# Altium PCB EPU.PcbDoc
Units mil, origin at the board's own origin, x right, y up, seen from the top; angles counter-clockwise.
Board outline 2755.91 x 2952.76 mil, 2 copper layers (Top Layer, Bottom Layer); 25 components, 23 nets, 112 pads, 58 vias.
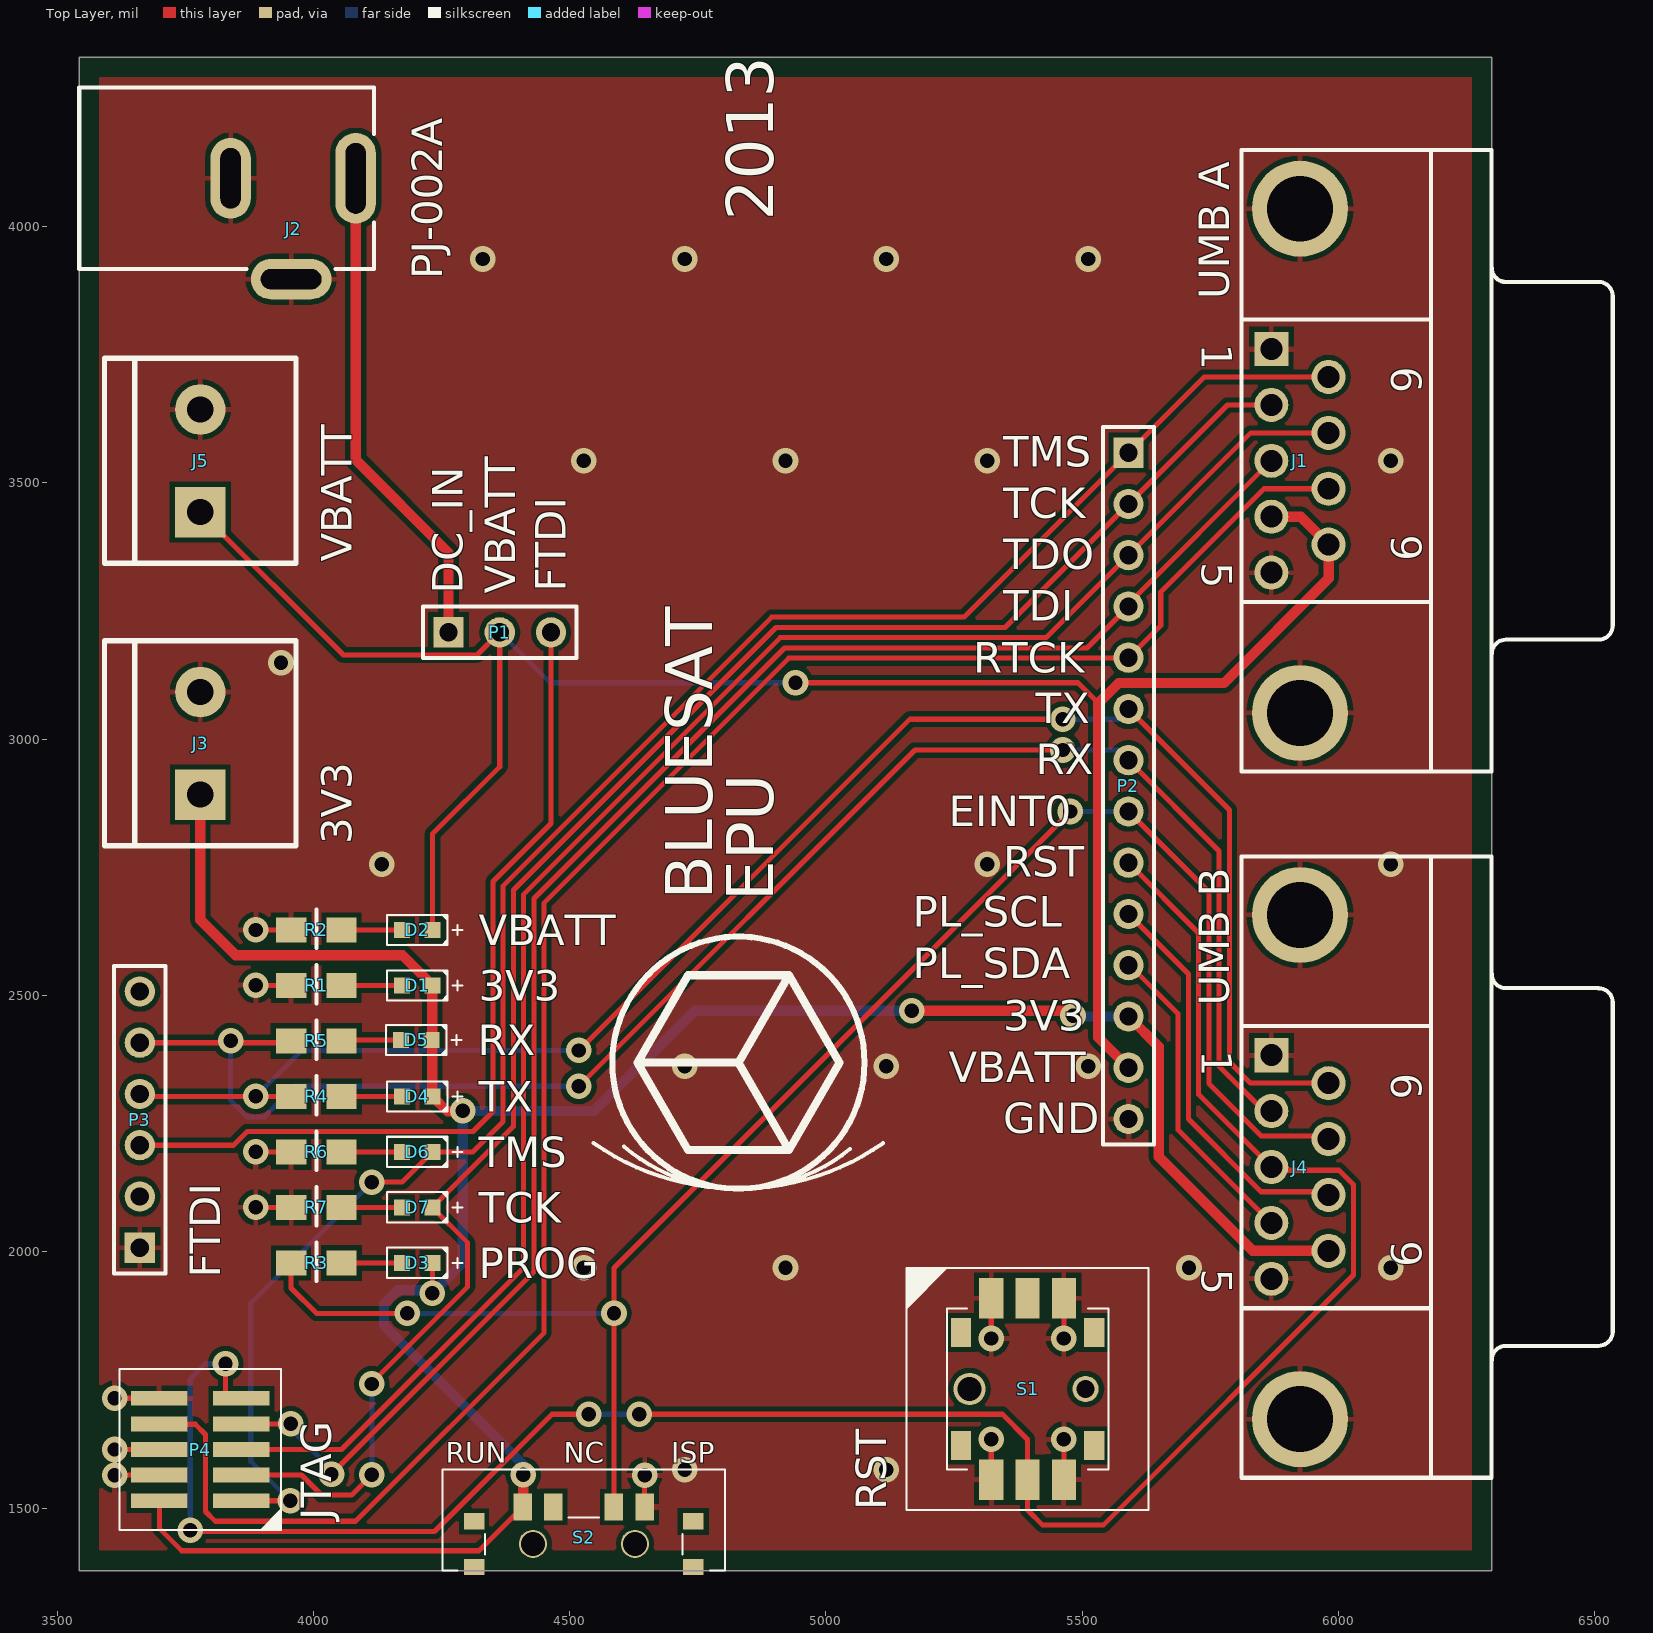
[diagram p0: Top Layer view]
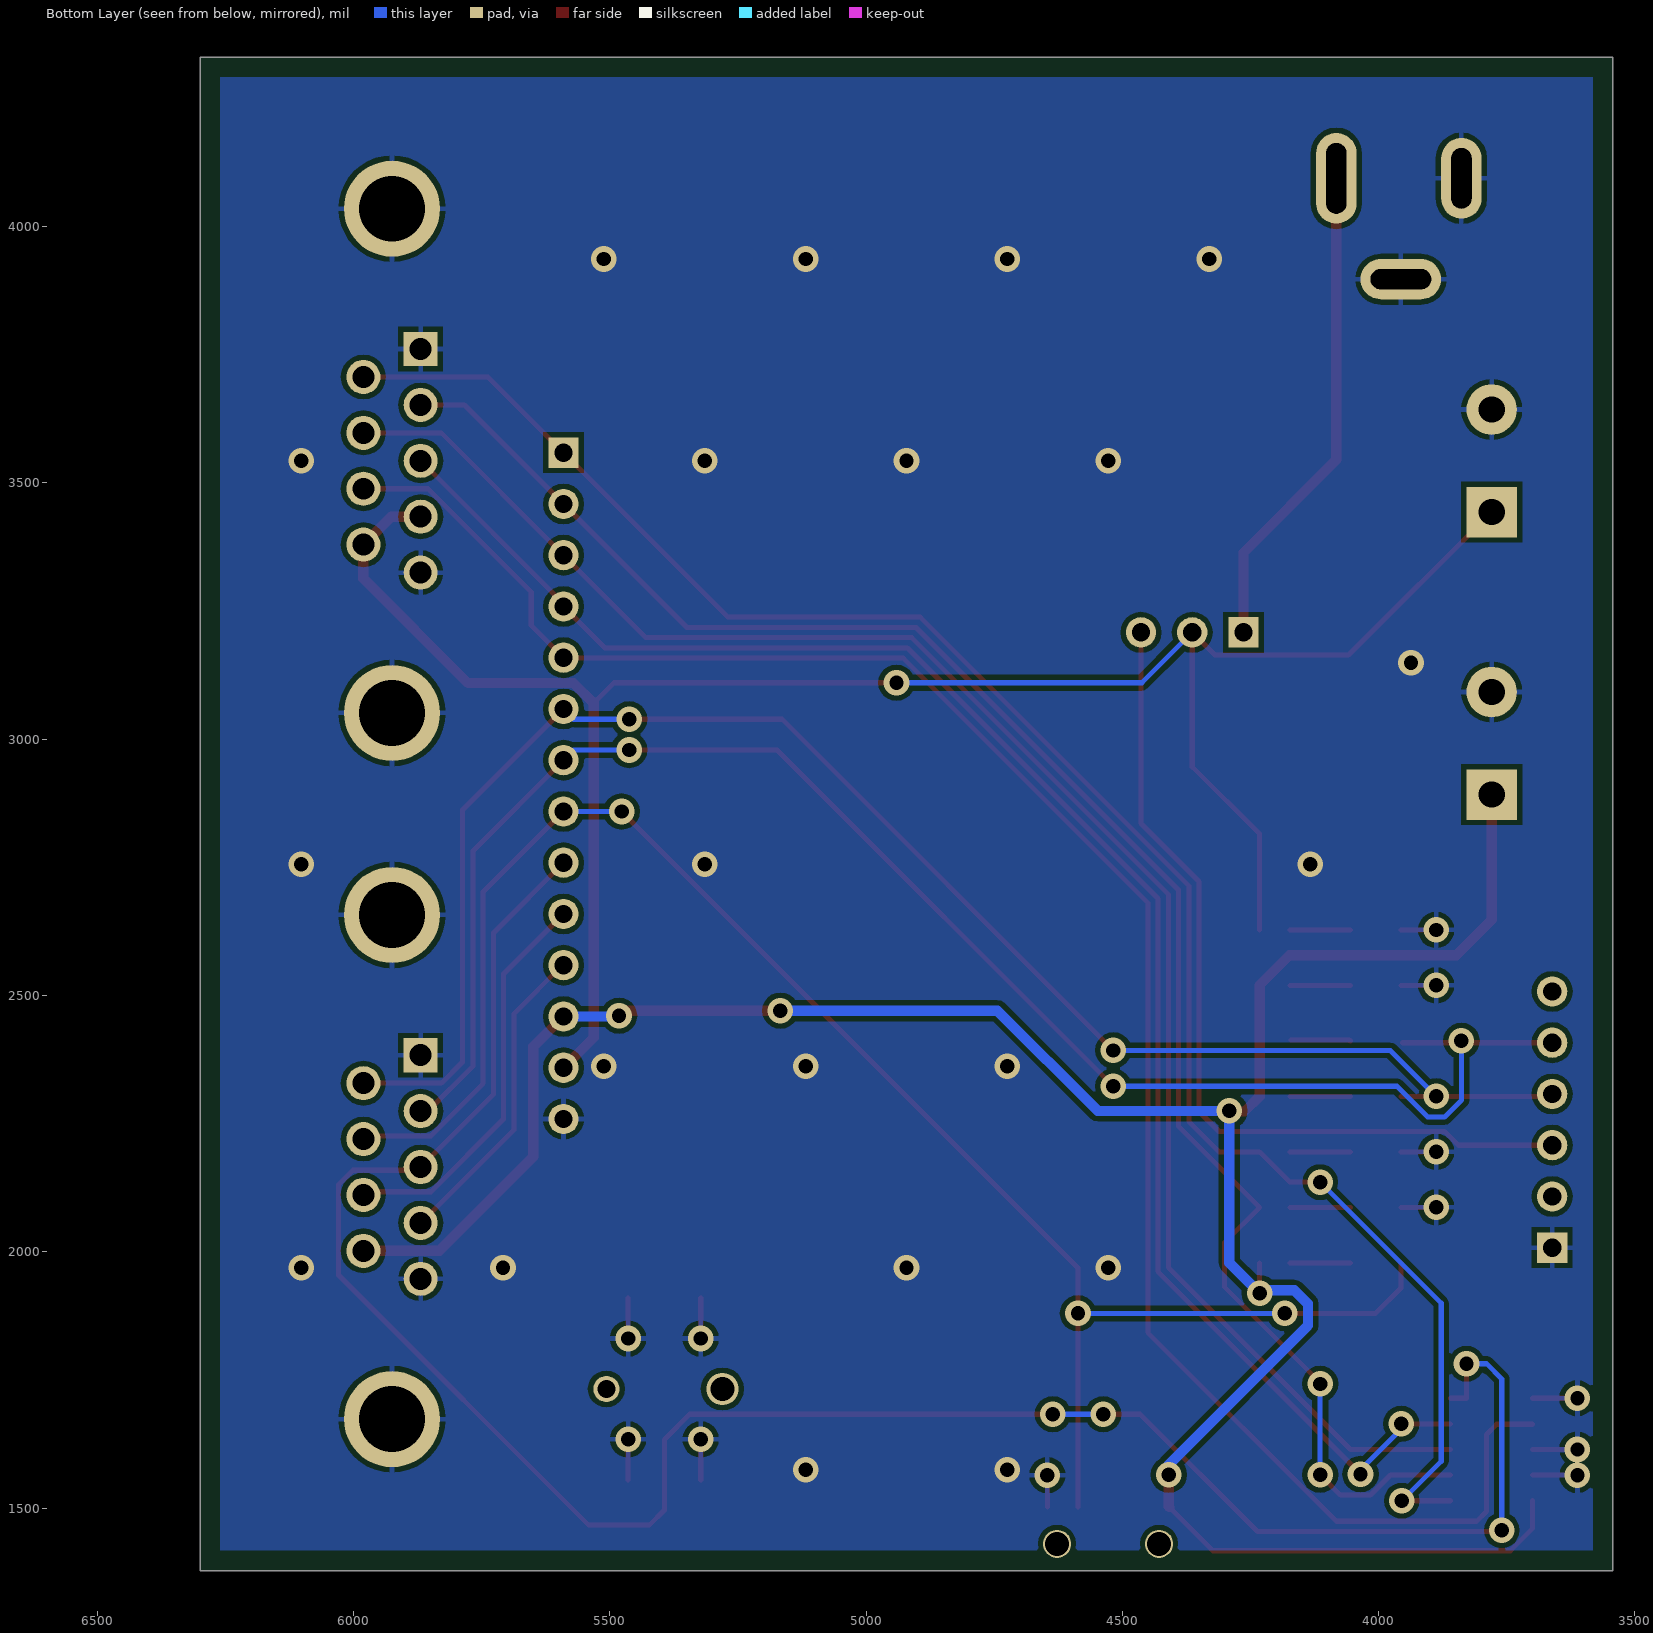
[diagram p1: Bottom Layer view, seen from below]

## Layer stack, top to bottom
Top Layer: signal copper 1.4
Dielectric: dielectric 12.6, FR-4, Dk 4.8
Bottom Layer: signal copper 1.4

## Board outline
3543.31,4330.71 6299.21,4330.71 6299.21,1377.95 3543.31,1377.95

## Design rules (kind name [scope] priority, off if disabled: settings)
Clearance [All] p1: gap=10
PolygonConnect [All] p1: connectstyle=Relief reliefconductorwidth=10 reliefentries=4 polygonreliefangle="90 Angle" airgapwidth=10
RoutingVias [All] p1: holewidth=28 width=50 viastyle="Through Hole" minholewidth=28 minwidth=50 maxholewidth=28 maxwidth=50
SilkscreenOverComponentPads [All] p1: minsilkscreentomaskgap=10
SolderMaskExpansion [All] p1: expansion=4
Width [All] p1: maxlimit=100 minlimit=10 preferedwidth=10
27 further rules are at their usual default settings.

## Components (designator, comment, footprint, x,y, rotation, side; value= is the part's Value field where it differs from the comment)
D1 "3V3" ASMT-Rx45 4202.76,2519.69 r180 top
D2 "VBATT" ASMT-Rx45 4202.76,2627.95 r180 top
D3 "PROG" ASMT-Rx45 4202.76,1978.35 r180 top
D4 "TX" ASMT-Rx45 4202.76,2303.15 r180 top
D5 "RX" ASMT-Rx45 4200.79,2413.39 r180 top
D6 "TMS" ASMT-Rx45 4202.76,2194.88 r180 top
D7 "TCK" ASMT-Rx45 4202.76,2086.61 r180 top
J1 "UMB A" DSUB1.385-2H9 6299.21,3543.31 r270 top
J2 "PJ-002A" PJ-002A 3543.31,4094.49 r0 top
J3 "3V3" "5.05mm Terminal Block" 3779.53,2992.13 r90 top
J4 "UMB B" DSUB1.385-2H9 6299.21,2165.35 r270 top
J5 "VBATT" "5.05mm Terminal Block" 3779.53,3543.31 r90 top
P1 "VBATT_SEL" HDR1X3 4263.78,3208.66 r0 top
P2 "" HDR1X14 5590.55,3559.06 r270 top
P3 "FTDI" HDR1X6 3661.42,2007.87 r90 top
P4 "JTAG" FTSH-105-01-L-DV-TR 3779.53,1614.17 r90 top
R1 "Res3" "0805 Cap" 4005.91,2519.69 r0 top
R2 "Res3" "0805 Cap" 4005.91,2627.95 r0 top
R3 "Res3" "0805 Cap" 4005.91,1978.35 r0 top
R4 "Res3" "0805 Cap" 4005.91,2303.15 r0 top
R5 "Res3" "0805 Cap" 4005.91,2411.42 r0 top
R6 "Res3" "0805 Cap" 4005.91,2194.88 r0 top
R7 "Res3" "0805 Cap" 4005.91,2086.61 r0 top
S1 "RST" K5A2 5393.7,1732.28 r0 top
S2 "EINT0" MILL1300S 4527.56,1377.95 r0 top

## Footprints (in the part's own frame and the unit in brackets; to place one, negate y for a bottom-side part, rotate by r counter-clockwise, add the part's x,y. Pads: shape width x height; smd on the part's side, far side on the other; paste and mask are expansions set on the pad)
"5.05mm Terminal Block" [mm]
  rect 2.5x2.5 hole 1.3: 1(-2.54,0)
  round 2.5 hole 1.3: 2(2.54,0)
  silkscreen extent -5.08,-4.75 5.08,4.75
"0805 Cap" [mm] "0805 Capacitor"
  rect 1.5x1.25 smd: 1(1.25,0) 2(-1.25,0)
  silkscreen extent 0,-0.89 0,1.02, body extent -1,-0.63 1.1,0.63, height 0.9
ASMT-Rx45 [mm]
  rect 0.8x0.8 smd: 1(-0.75,0) 2(0.75,0)
  silkscreen extent -2.25,-0.75 1.5,0.75, body extent -0.8,-0.4 0.8,0.4, height 0.45
DSUB1.385-2H9 [mm] "Connector; D Subminiature; 9 Position; Right Angle; Pitch 1.385 mm"
  rect 1.69x1.69 hole 1.09: 1(-5.54,-10.92)
  round 1.69 hole 1.09: 2(-2.77,-10.92) 3(0,-10.92) 4(2.77,-10.92) 5(5.54,-10.92) 6(-4.155,-8.08) 7(-1.385,-8.08) 8(1.385,-8.08) 9(4.155,-8.08)
  round 4.76 hole 3.26: 10(-12.495,-9.5) 11(12.495,-9.5)
  silkscreen extent -15.4,-12.4 15.4,6
FTSH-105-01-L-DV-TR [mil] "http://www.samtec.com/ftppub/cpdf/FTSHMKT1.PDF"
  rect 29x110 smd: 1(-100,-80) 2(-100,80) 3(-50,-80) 4(-50,80) 5(0,-80) 6(0,80) 7(50,-80) 8(50,80) 9(100,-80) 10(100,80)
  silkscreen extent -157,-157 157,157, body extent -125,-115 125,115, height 234
HDR1X3 [mm] "Connector; Header; 3 Position"
  rect 1.5x1.5 hole 0.9: 1(0,0)
  round 1.5 hole 0.9: 2(2.54,0) 3(5.08,0)
  silkscreen extent -1.27,-1.27 6.35,1.27
HDR1X6 [mm] "Connector; Header; 6 Position"
  rect 1.5x1.5 hole 0.9: 1(0,0)
  round 1.5 hole 0.9: 2(2.54,0) 3(5.08,0) 4(7.62,0) 5(10.16,0) 6(12.7,0)
  silkscreen extent -1.27,-1.27 13.97,1.27
HDR1X14 [mm] "Connector; Header; 14 Position"
  rect 1.5x1.5 hole 0.9: 1(0,0)
  round 1.5 hole 0.9: 2(2.54,0) 3(5.08,0) 4(7.62,0) 5(10.16,0) 6(12.7,0) 7(15.24,0) 8(17.78,0) 9(20.32,0) 10(22.86,0) 11(25.4,0) 12(27.94,0) 13(30.48,0) 14(33.02,0)
  silkscreen extent -1.27,-1.27 34.29,1.27
K5A2 [mm]
  rect 1x1.42 smd: 0(-3.3,-2.8) 0(-3.3,2.8) 8(3.3,-2.8) 9(3.3,2.8)
  round 1.6 hole 1.2: 0(-2.875,0)
  round 1.3 hole 0.9: 0(2.875,0)
  rect 1.2x2 smd: 1(-1.8,4.5) 2(0,4.5) 3(1.8,4.5) 4(-1.8,-4.5) 5(0,-4.5) 6(1.8,-4.5)
  silkscreen extent -6,-6 6,6, body extent -4.13,-4 4.13,4, height 4.55
MILL1300S [mil]
  rect 40x32 smd: 0(-214,7) 0(-214,96) 0(214,7) 0(214,96)
  round 55.12 hole 46.46 paste+0 mask+0: 0(-99,52) 0(100,52)
  rect 36x52 smd: 1(-119,124) 2(-59,124) 3(59,124) 4(119,124)
  silkscreen extent -276,0 276,197, body extent -213,-60 213,139, height 56
PJ-002A [mm] "DC Power Jack, 2.5mm, KLD Series, PCB Mount"
  oval 2x4.5 hole 1 slot 3.5 at 90 deg: 1(13.7,0)
  oval 2x4 hole 1 slot 3 at 90 deg: 2(7.5,0)
  oval 4x2 hole 1 slot 3 at 0 deg: 3(10.5,-5)
  silkscreen extent 0,-4.5 14.6,4.5

## Part data
D1 D2 D3 D4 D5 D6 D7: library part LED, "Typical INFRARED GaAs LED 0603"
J1 J4: library part "D Connector 9", "Receptacle Assembly, 9 Position, Right Angle"
J2: library part PWR2.5, "Low Voltage Power Supply Connector"
J3 J5: library part "Header 2", "Header, 2-Pin"
P1: library part "Header 3", "Header, 3-Pin"
P2: library part "Header 14", "Header, 14-Pin"
P3: library part "Header 6", "Header, 6-Pin"
P4: library part "Header 5X2", "Header, 5-Pin, Dual row"
R1 R2 R3 R4 R5 R6 R7: "Resistor"
S1: library part KS2A, "Tact Switch"
S2: library part MLL1300S, "Slide switch SP3T switch"

## Via types
v1: diameter 50, hole 28, Top Layer to Bottom Layer, tented both sides, 58 vias

## Nets (pads, with @x,y where several pads share a name; then routed paths per layer and width w, separated by ;. In a path a pad name is that pad's centre, name@x,y a point inside that pad or via, vN(x,y) a via of type N, cw(c..) or ccw(c..) an arc to the next point about the centre after c; other vN are vias at no path point)
3V3_BUS: D1.1 D3.1 D4.1 D5.1 J3.1 J4.9 P2.12 P4.2 S2.1 | length 5016.6
  Top Layer w10: P4.2 3699.53,1460.44 3743.27,1416.69 4323.3,1416.69 S2.1 ; v1(4232.28,1919.29) D3.1 ; J4.9@5974.84,2008.03 J4.9
  Top Layer w20: J3.1 3779.53,2647.64 3848.43,2578.74 4173.95,2578.74 4232.28,2520.41 D1.1 D4.1 4261.81,2273.62 4290.08,2273.62 v1(4291.34,2274.88) ; S2.1 4409.44,1502.83 v1(4409.44,1564.96) ; v1(5167.33,2470.46) 5482.27,2470.46 v1(5482.27,2460.62) ; P2.12 5649.61,2400 5649.61,2185.04 5832.87,2001.77 J4.9
  Bottom Layer w20: v1(4409.44,1564.96) 4409.44,1584.64 4138.07,1856.02 4138.07,1898.56 4164.43,1924.92 4226.65,1924.92 v1(4232.28,1919.29) 4291.34,1978.35 v1(4291.34,2274.88) 4548.5,2274.88 4744.08,2470.46 v1(5167.33,2470.46) ; v1(5482.27,2460.62) 5483.84,2459.06 P2.12
EINT0: J4.7 P2.8 R3.2 S2.3 | length 3414.2
  Top Layer w10: R3.2 3956.69,1929.13 4006.53,1879.29 4182.44,1879.29 v1(4183.07,1879.92) ; S2.3 4586.56,1968.45 v1(5477.17,2859.06) ; P2.8 5747.4,2702.2 5747.4,2328.04 5849.3,2226.14 5974.84,2226.14 J4.7
  Bottom Layer w10: v1@4183.07,1879.29 4585.98,1879.29 v1(4586.61,1879.92) ; v1(5477.17,2859.06) P2.8
GND: J1.1 J1.5 J1.10 J1.11 J2.2 J2.3 J3.2 J4.1 J4.5 J4.10 J4.11 J5.2 P2.14 P3.1 P4.4 P4.6 P4.10 R1.2 R2.2 R6.2 R7.2 S1.1 S1.3 S1.4 S1.6 S2.4 | length 914.6
  Top Layer w10: v1(3612.2,1564.17) P4.4 ; v1(3612.2,1614.17) P4.6 ; v1(3612.2,1714.17) P4.10 ; v1(3887.8,2086.61) R7.2 ; v1(3887.8,2194.88) R6.2 ; v1(3887.8,2519.69) R1.2 ; v1(3887.8,2627.95) R2.2 ; S2.4 v1(4646.56,1564.07) ; S1.4 v1(5322.83,1633.86) ; v1(5322.83,1830.71) S1.1 ; S1.6 v1(5464.57,1633.86) ; v1(5464.57,1830.71) S1.3
  other v1: 4724.41,1574.8 5118.11,1574.8 4527.56,1968.5 4921.26,1968.5 5708.66,1968.5 6102.36,1968.5 4724.41,2362.2 5118.11,2362.2 5511.81,2362.2 4133.86,2755.91 5314.96,2755.91 6102.36,2755.91 3937.01,3149.61 4527.56,3543.31 4921.26,3543.31 5314.96,3543.31 6102.36,3543.31 4330.71,3937.01 4724.41,3937.01 5118.11,3937.01 5511.81,3937.01
NetD1_2: D1.2 R1.1 | length 118.1
  Top Layer w10: R1.1 4090.54,2519.69 D1.2
NetD2_2: D2.2 R2.1 | length 118.1
  Top Layer w10: R2.1 4149.6,2627.95 D2.2
NetD3_2: D3.2 R3.1 | length 118.1
  Top Layer w10: R3.1 4090.54,1978.35 D3.2
NetD4_2: D4.2 R4.1 | length 118.1
  Top Layer w10: R4.1 4090.54,2303.15 D4.2
NetD5_2: D5.2 R5.1 | length 117
  Top Layer w10: R5.1 4057.09,2413.39 D5.2
NetD6_2: D6.2 R6.1 | length 118.1
  Top Layer w10: R6.1 D6.2
NetD7_2: D7.2 R7.1 | length 118.1
  Top Layer w10: R7.1 4090.54,2086.61 D7.2
PL_SCL: J4.8 P2.10 | length 783.5
  Top Layer w10: P2.10 5707.4,2542.2 5707.4,2258.98 5849.3,2117.09 5974.84,2117.09 J4.8
PL_SDA: J4.4 P2.11 | length 619.6
  Top Layer w10: P2.11 5592.91,2559.06 5687.4,2464.57 5687.4,2238.19 J4.4
RST: J4.3 P2.9 P4.9 S1.5 | length 4272.3
  Top Layer w10: v1(3759.84,1456.69) 3762.36,1454.17 4236.57,1454.17 4465.46,1683.07 v1(4537.39,1683.07) ; v1(3828.74,1781.5) 3828.74,1714.17 P4.9 ; v1(4635.82,1683.07) 5344.49,1683.07 5393.7,1633.86 S1.5 5393.7,1496.06 5423.23,1466.54 5541.34,1466.54 6029.37,1954.57 6029.37,2130.82 6001.1,2159.09 5875.55,2159.09 J4.3 5727.4,2307.24 5727.4,2622.2 P2.9
  Bottom Layer w10: v1(3759.84,1456.69) 3759.84,1751.97 3789.37,1781.5 v1(3828.74,1781.5) ; v1(4537.39,1683.07) v1(4635.82,1683.07)
RTCK: J1.8 P2.5 P4.8 | length 3812.3
  Top Layer w10: P4.8 3700.32,1663.39 3769.69,1663.39 3789.53,1643.54 3789.53,1493.46 3808.81,1474.17 4082.44,1474.17 4450.39,1842.13 4450.39,2680.87 4927.72,3158.19 5589.69,3158.19 P2.5 5653.54,3222.05 5653.54,3287.4 5854.92,3488.78 J1.8
RX: J4.2 P2.7 P3.5 R5.2 | length 3286.3
  Top Layer w10: P3.5 R5.2@3953.15,2407.87 ; v1(4517.72,2322.83) 5173.94,2979.06 v1(5462.6,2979.06) ; P2.7 5767.4,2782.2 5767.4,2361.79 5854.79,2274.41 J4.2
  Bottom Layer w10: v1(3838.58,2411.42) 3838.58,2295.79 3871.23,2263.15 3904.36,2263.15 3964.05,2322.83 v1(4517.72,2322.83) ; v1(5462.6,2979.06) 5570.55,2979.06 P2.7
TCK: D7.1 J1.2 P2.2 P4.3 | length 3470.2
  Top Layer w10: P4.3 3977.16,1564.17 4015.75,1525.59 4074.8,1525.59 v1(4114.17,1564.96) ; v1(4114.17,1742.13) 4114.17,1744.61 4301.18,1931.62 4301.18,2017.72 D7.1 4390.39,2244.72 4390.39,2705.72 4902.86,3218.19 5349.69,3218.19 P2.2 5783.86,3652.36 J1.2
  Bottom Layer w10: v1(4114.17,1564.96) v1(4114.17,1742.13)
TDI: J1.3 P2.4 P4.7 | length 3309.8
  Top Layer w10: P4.7 v1(3955.9,1664.17) ; v1(4035.43,1566.2) 4430.39,1961.16 4430.39,2689.15 4919.43,3178.19 5509.69,3178.19 P2.4 5590.55,3264.57 J1.3
  Bottom Layer w10: v1(3955.9,1664.17) 3955.9,1654.33 4035.43,1574.8 v1(4035.43,1566.2)
TDO: J1.7 P2.3 P4.5 | length 3369.7
  Top Layer w10: P4.5 4055.12,1614.17 4410.39,1969.45 4410.39,2697.43 4911.15,3198.19 5429.69,3198.19 P2.3 5829.33,3597.83 J1.7
TMS: D6.1 J1.6 P2.1 P4.1 | length 3634.1
  Top Layer w10: P4.1 v1(3955.12,1514.17) ; v1(4114.17,2135.83) 4173.23,2135.83 D6.1 4311.02,2194.88 4370.39,2254.25 4370.39,2714 4894.58,3238.19 5269.69,3238.19 P2.1 5738.39,3706.89 J1.6
  Bottom Layer w10: v1(3955.12,1514.17) 3877.95,1591.34 3877.95,1899.61 v1(4114.17,2135.83)
TX: J4.6 P2.6 P3.4 R4.2 | length 3287.7
  Top Layer w10: P3.4@3666.14,2303.15 R4.2 ; v1(4517.72,2392.83) 5163.94,3039.06 v1(5462.6,3039.06) ; P2.6 5787.4,2862.2 5787.4,2370.08 5828.54,2328.94 J4.6
  Bottom Layer w10: v1(3887.8,2303.15) 3977.48,2392.83 v1(4517.72,2392.83) ; v1(5462.6,3039.06) 5570.55,3039.06 P2.6
VBATT: D2.1 J1.4 J1.9 J5.1 P1.2 P2.13 | length 4064.7
  Top Layer w10: J5.1 4058.7,3164.13 4319.25,3164.13 P1.2 4363.78,2946.46 4232.28,2814.96 D2.1 ; v1(4940.94,3110.24) 5492.13,3110.24 5531.91,3070.45
  Top Layer w20: 5531.5,3070.04 5531.5,2418.11 P2.13 ; 5531.91,3070.45 5570.98,3109.53 5776.85,3109.53 5981.1,3313.78 J1.9 5926.57,3434.25 J1.4
  Bottom Layer w10: P1.2 4462.2,3110.24 v1(4940.94,3110.24)
VIN_DC: J2.1 P1.1 | length 960.8
  Top Layer w20: J2.1 4082.68,3545.28 4263.78,3364.17 P1.1
VIN_FTDI: P1.3 P3.3 | length 1698.2
  Top Layer w10: P3.3 3844.22,2207.87 3871.23,2234.88 4311.65,2234.88 4350.39,2273.62 4350.39,2722.29 4463.78,2835.67 P1.3
pads on no net: P3.2 P3.6 S1.0 S1.2 S1.8 S1.9 S2.0 S2.2

## Polygon pours and split planes (outlines as drawn)
GND on Bottom Layer "Top Layer-No Net" (solid, pour order 2): 3582.68,1417.32 3582.68,4291.34 6259.84,4291.34 6259.84,1417.32
GND on Top Layer "Top Layer-No Net" (solid, pour order 2): 3582.68,1417.32 3582.68,4291.34 6259.84,4291.34 6259.84,1417.32

## Silkscreen, mask and mechanical layers (free items; w line width, h text height)
Top Overlay:
  circle w11.81: c4829.42,2368.99 r246.06
  lines w7.87: 4547.15,2211.93 ccw(c4829.42,2615.06) 5111.69,2211.93 ; 4606.03,2205.18 ccw(c4829.42,2467.42) 5047.02,2200.36
  lines w15.75: 4632.57,2368.99 4829.42,2368.99 ; 4632.57,2368.99 4730.99,2198.51 4927.84,2198.51 ; 4632.57,2368.99 4730.99,2539.47 4927.84,2539.47 ; 4829.42,2368.99 4927.84,2539.47 ; 4829.42,2368.99 4927.84,2198.51 ; 4927.84,2198.51 5026.27,2368.99 4927.84,2539.47
  text "TMS" at 5346.46,3531.5 h60
  text "TCK" at 5346.46,3431.5 h60
  text "TDO" at 5346.46,3331.5 h60
  text "FTDI" at 4492.13,3287.4 h60 r90
  text "DC_IN" at 4291.34,3283.46 h60 r90
  text "VBATT" at 4393.7,3283.46 h60 r90
  text "TDI" at 5346.46,3231.5 h60
  text "RTCK" at 5287.4,3129.92 h60
  text "TX" at 5409.45,3031.5 h60
  text "RX" at 5409.45,2931.5 h60
  text "EINT0" at 5240.16,2830.71 h60
  text "RST" at 5346.46,2731.5 h60
  text "BLUESAT" at 4809.06,2687.01 h157.48 r90
  text "EPU                           2013" at 4927.84,2683.95 h157.48 r90
  text "PL_SCL" at 5169.29,2633.86 h60
  text "PL_SDA" at 5169.29,2533.86 h60
  text "3V3" at 5346.46,2431.5 h60
  text "VBATT" at 5240.16,2330.71 h60
  text "GND" at 5346.46,2231.5 h60
  text "RUN" at 4258.58,1587.95 h40
  text "NC" at 4488.58,1587.95 h40
  text "ISP" at 4698.58,1587.95 h40

## Text inside footprints (layer, text, board x,y; h text height)
J1: Top Overlay "6" at 6103.35,3726.57 h59.06 r270; Top Overlay "9" at 6103.35,3399.41 h59.06 r270; Top Overlay "5" at 5733.27,3344.88 h59.06 r270; Top Overlay "1" at 5733.27,3771.26 h59.06 r270
J2: Mechanical 1 "Mech 2 - Clearance, move to internal plane if present" at 3554.57,4293.93 h11.81; Mechanical 1 "Mech 1 - Slot cut-out" at 3554.57,4313.62 h11.81; Mechanical 1 "Assign keep-out area to slot" at 3554.57,4352.99 h11.81; Mechanical 1 "Alert PCB fab to slot details" at 3554.57,4333.3 h11.81
J4: Top Overlay "1" at 5733.27,2393.31 h59.06 r270; Top Overlay "5" at 5733.27,1966.93 h59.06 r270; Top Overlay "9" at 6103.35,2021.46 h59.06 r270; Top Overlay "6" at 6103.35,2348.62 h59.06 r270